# EAGLE board v2 (EAGLE 9.6.2)
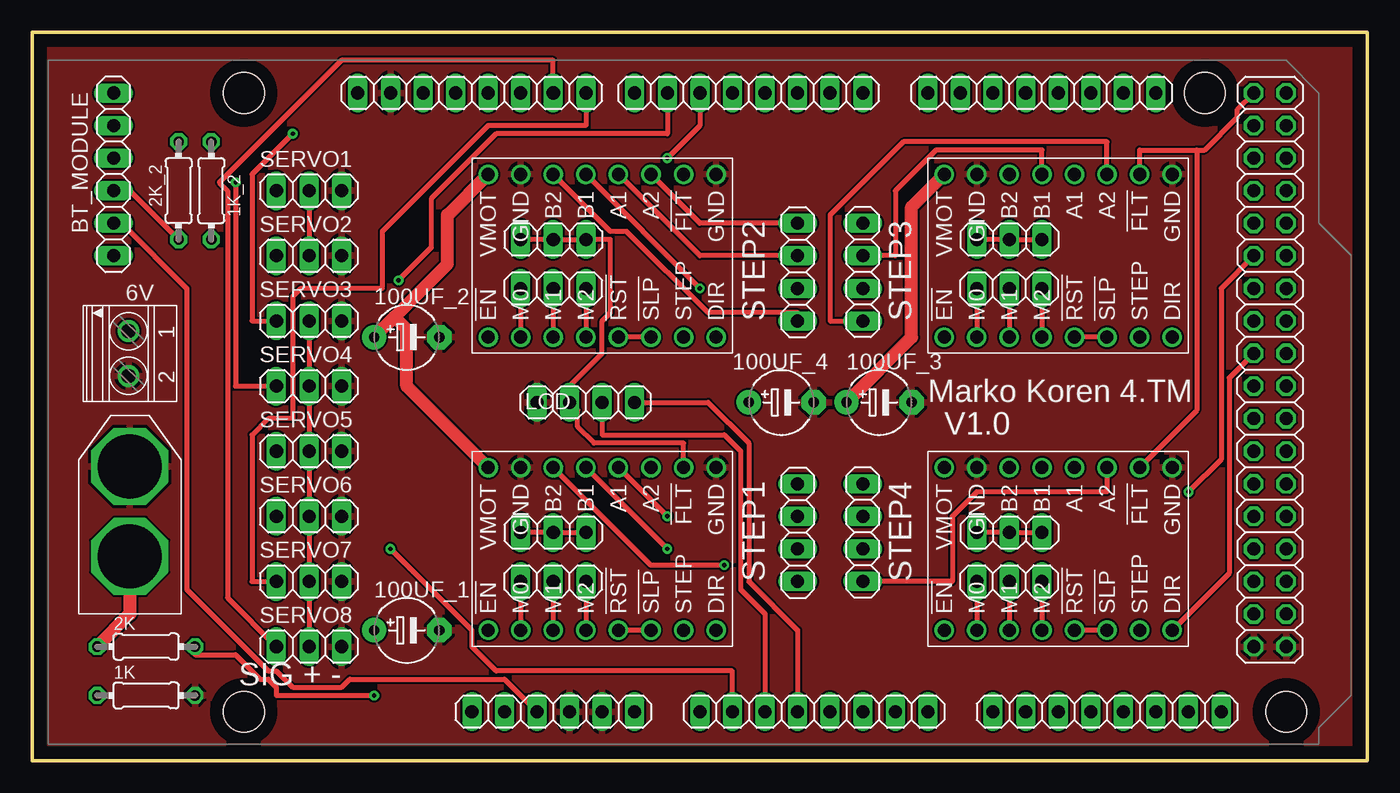
[diagram p0: board, top side]
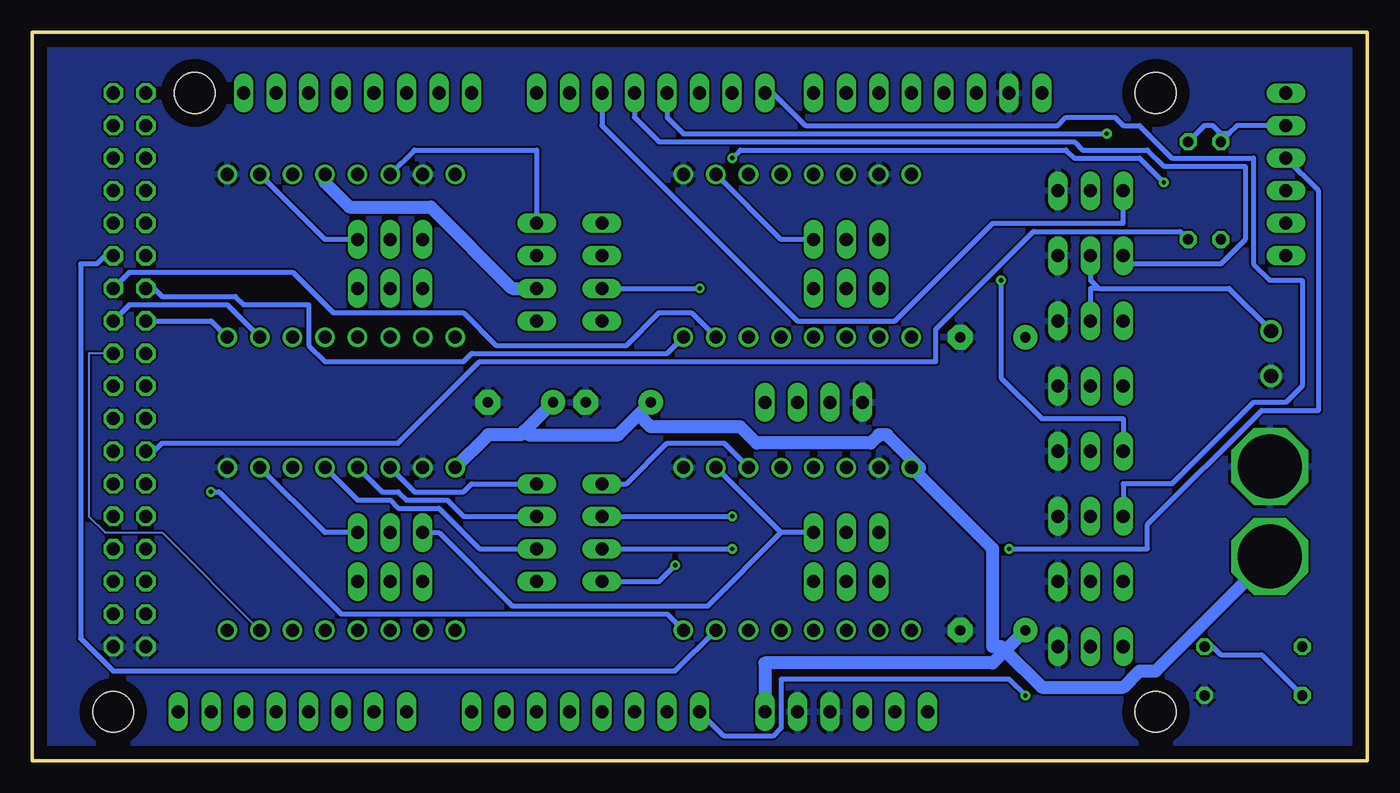
[diagram p1: board, bottom side, seen from below]

Size 104.12 x 56.82 mm. Coordinates in mm from the lower left corner, seen from the top.
Outline: 0,0 104.12,0 104.12,56.82 0,56.82 0,0
Copper layers (1*16): Top 0.035mm / dielectric 1.5mm / Bottom 0.035mm
Design rules "default": minimum track width 6mil, minimum drill 0.35mm, track to track 6mil, track to pad 6mil, pad to pad 6mil, via to via 6mil, smd to smd 6mil, copper to edge 40mil, drill to drill 6mil, minimum pad ring 10mil, minimum via ring 8mil, stop-mask expansion 4mil, vias tented up to drill 0mil, thermal gap 10mil
Net classes: 1 12V: width 1.016 mm, clearance 0.076 mm; 2 ALL: width 0.381 mm, clearance 0.076 mm

## Footprints (pad centres in the part's own frame; a part is rotated, then mirrored left to right if it is on the bottom)
0204/7 = drill 0.813 octagon: 1 -3.81,0; 2 3.81,0
1X03 = drill 1.016 long: 1 -2.54,0; 2 0,0; 3 2.54,0
1751248 = drill 1.1 pad 1.7: 1 -1.75,-0.1; 2 1.75,-0.1
E5-5 = drill 0.813 pad 1.905: + -2.54,0 | drill 0.813 pad 1.905 octagon: - 2.54,0
1X06 = drill 1.016 long: 1 -6.35,0; 2 -3.81,0; 3 -1.27,0; 4 1.27,0; 5 3.81,0; 6 6.35,0
MEGA_ARDUINO_2 = drill 1.016 long: 1 33.02,2.54; 2 35.56,2.54; 3 38.1,2.54; 4 40.64,2.54; 5 43.18,2.54; 6 45.72,2.54; 7 50.8,2.54; 8 53.34,2.54; 9 55.88,2.54; 10 58.42,2.54; 11 60.96,2.54; 12 63.5,2.54; 13 66.04,2.54; 14 68.58,2.54; 15 73.66,2.54; 16 76.2,2.54; 17 78.74,2.54; 18 81.28,2.54; 19 83.82,2.54; 20 86.36,2.54; 21 88.9,2.54; 22 91.44,2.54; 23 86.36,50.8; 24 83.82,50.8; 25 81.28,50.8; 26 78.74,50.8; 27 76.2,50.8; 28 73.66,50.8; 29 71.12,50.8; 30 68.58,50.8; 31 63.5,50.8; 32 60.96,50.8; 33 58.42,50.8; 34 55.88,50.8; 35 53.34,50.8; 36 50.8,50.8; 37 48.26,50.8; 38 45.72,50.8; 39 41.91,50.8; 40 39.37,50.8; 41 36.83,50.8; 42 34.29,50.8; 43 31.75,50.8; 44 29.21,50.8; 45 26.67,50.8; 46 24.13,50.8 | drill 1.016 octagon: 47 93.98,50.8; 48 96.52,50.8; 49 93.98,48.26; 50 96.52,48.26; 51 93.98,45.72; 52 96.52,45.72; 53 93.98,43.18; 54 96.52,43.18; 55 93.98,40.64; 56 96.52,40.64; 57 93.98,38.1; 58 96.52,38.1; 59 93.98,35.56; 60 96.52,35.56; 61 93.98,33.02; 62 96.52,33.02; 63 93.98,30.48; 64 96.52,30.48; 65 93.98,27.94; 66 96.52,27.94; 67 93.98,25.4; 68 96.52,25.4; 69 93.98,22.86; 70 96.52,22.86; 71 93.98,20.32; 72 96.52,20.32; 73 93.98,17.78; 74 96.52,17.78; 75 93.98,15.24; 76 96.52,15.24; 77 93.98,12.7; 78 96.52,12.7; 79 93.98,10.16; 80 96.52,10.16; 81 93.98,7.62; 82 96.52,7.62 | hole 3.2: 15.24,50.8; 15.24,2.54; 90.17,50.8; 96.52,2.54
1X04 = drill 1.016 long: 1 -3.81,0; 2 -1.27,0; 3 1.27,0; 4 3.81,0
DRV8825 = drill 1.016: 1 -6.35,8.89; 2 -6.35,6.35; 3 -6.35,3.81; 4 -6.35,1.27; 5 -6.35,-1.27; 6 -6.35,-3.81; 7 -6.35,-6.35; 8 -6.35,-8.89; 9 6.35,-8.89; 10 6.35,-6.35; 11 6.35,-3.81; 12 6.35,-1.27; 13 6.35,1.27; 14 6.35,3.81; 15 6.35,6.35; 16 6.35,8.89
XT60 = drill 5 octagon: + 4.5,0; - 11.5,0

## Placement (x,y rotation side)
1K  [0204/7]  8.89,5.08 0 top
1K_2  [0204/7]  13.97,44.45 270 top
2K  [0204/7]  8.89,8.89 0 top
2K_2  [0204/7]  11.43,44.45 90 top
5V_1  [1X03]  40.64,17.78 0 top
5V_2  [1X03]  76.2,17.78 0 top
5V_3  [1X03]  76.2,40.64 0 top
5V_4  [1X03]  40.64,40.64 0 top
6V  1751248  [1751248]  7.62,31.75 270 top
100UF_1  [E5-5]  29.21,10.16 0 top
100UF_2  [E5-5]  29.21,33.02 0 top
100UF_3  [E5-5]  66.04,27.94 0 top
100UF_4  [E5-5]  58.42,27.94 0 top
BT_MODULE  [1X06]  6.35,45.72 270 top
IC1  [MEGA_ARDUINO_2]  1.27,1.27 0 top
LCD  [1X04]  43.18,27.94 180 top
MOT2  [1X04]  59.69,38.1 90 top
MOT3  [1X04]  64.77,38.1 270 top
MOT4  [1X04]  64.77,17.78 270 top
MOT_1  [1X04]  59.69,17.78 90 top
SERVO1  [1X03]  21.59,44.45 0 top
SERVO2  [1X03]  21.59,39.37 0 top
SERVO3  [1X03]  21.59,34.29 0 top
SERVO4  [1X03]  21.59,29.21 0 top
SERVO5  [1X03]  21.59,24.13 0 top
SERVO6  [1X03]  21.59,19.05 0 top
SERVO7  [1X03]  21.59,13.97 0 top
SERVO8  [1X03]  21.59,8.89 0 top
STEP1  2133-DRV8825  [DRV8825]  44.45,16.51 90 top
STEP2  2133-DRV8825  [DRV8825]  44.45,39.37 90 top
STEP3  2133-DRV8825  [DRV8825]  80.01,39.37 90 top
STEP4  2133-DRV8825  [DRV8825]  80.01,16.51 90 top
STEPS1  [1X03]  40.64,13.97 180 top
STEPS2  [1X03]  40.64,36.83 180 top
STEPS3  [1X03]  76.2,36.83 180 top
STEPS4  [1X03]  76.2,13.97 180 top
U$1  XT60  [XT60]  7.62,11.43 90 top

## Library data of the parts
1K 1K_2 2K 2K_2 = rcl; SPICEPREFIX: R
5V_1-5V_4 BT_MODULE LCD MOT2-MOT4 MOT_1 SERVO1-SERVO8 STEPS1-STEPS4 = pinhead
6V = con-phoenix-350; OC_FARNELL: unknown; OC_NEWARK: unknown
100UF_1-100UF_4 = rcl; SPICEPREFIX: C
IC1 = arduino
STEP1-STEP4 = pololu-stepper-driver
U$1 = XT60

## Nets
5-6V [ALL]: 6V.1 SERVO1.2 SERVO2.2 SERVO3.2 SERVO4.2 SERVO5.2 SERVO6.2 SERVO7.2 SERVO8.2
12V1 [12V]: 2K.1 100UF_1.+ 100UF_2.+ 100UF_3.+ 100UF_4.+ IC1.6 STEP1.16 STEP2.16 STEP3.16 STEP4.16 U$1.+
30 [ALL]: IC1.57 STEP1.8
31 [ALL]: IC1.58 STEP1.7
32 [ALL]: IC1.59 STEP2.8
33 [ALL]: IC1.60 STEP2.7
34 [ALL]: IC1.61 STEP3.8
35 [ALL]: IC1.62 STEP3.7
36 [ALL]: IC1.63 STEP4.8
37: IC1.64 STEP4.7
+3V3: IC1.2
+5V: IC1.48
A2 [ALL]: IC1.9 LCD.2
A3 [ALL]: IC1.10 LCD.1
GND [ALL]: 1K.2 6V.2 100UF_1.- 100UF_2.- 100UF_3.- 100UF_4.- IC1.4 IC1.5 IC1.45 IC1.81 IC1.82 LCD.4 SERVO1.3 SERVO2.3 SERVO3.3 SERVO4.3 SERVO5.3 SERVO6.3 SERVO7.3 SERVO8.3 STEP1.9 STEP1.15 STEP2.9 STEP2.15 STEP3.9 STEP3.15 STEP4.9 STEP4.15 U$1.-
N$1 [ALL]: 1K.1 2K.2 IC1.7
N$2 [ALL]: MOT_1.1 STEP1.14
N$3 [ALL]: MOT_1.2 STEP1.13
N$4 [ALL]: MOT_1.3 STEP1.12
N$5 [ALL]: MOT_1.4 STEP1.11
N$6 [ALL]: MOT2.1 STEP2.14
N$7 [ALL]: MOT2.2 STEP2.13
N$8 [ALL]: MOT2.3 STEP2.12
N$9 [ALL]: MOT2.4 STEP2.11
N$10 [ALL]: MOT3.1 STEP3.14
N$11 [ALL]: MOT3.2 STEP3.13
N$12 [12V]: MOT3.3 STEP3.12
N$13 [ALL]: MOT3.4 STEP3.11
N$14 [ALL]: MOT4.1 STEP4.14
N$15 [ALL]: MOT4.2 STEP4.13
N$16 [ALL]: MOT4.3 STEP4.12
N$17 [ALL]: MOT4.4 STEP4.11
N$18 [ALL]: STEP1.2 STEPS1.3
N$19 [ALL]: 2K_2.1 BT_MODULE.4
N$20 [ALL]: 1K_2.1 2K_2.2 BT_MODULE.2
N$21 [ALL]: BT_MODULE.5 IC1.3
N$22 [ALL]: STEP1.3 STEPS1.2
N$23 [ALL]: STEP1.4 STEPS1.1
N$24 [ALL]: STEP2.2 STEPS2.3
N$25 [ALL]: STEP2.3 STEPS2.2
N$26 [ALL]: STEP2.4 STEPS2.1
N$27 [ALL]: STEP3.2 STEPS3.3
N$28 [ALL]: STEP3.3 STEPS3.2
N$29 [ALL]: STEP3.4 STEPS3.1
N$30 [ALL]: STEP4.2 STEPS4.3
N$31 [ALL]: STEP4.3 STEPS4.2
N$32 [ALL]: STEP4.4 STEPS4.1
N$33 [ALL]: STEP1.5 STEP1.6
N$34 [ALL]: STEP2.5 STEP2.6
N$35 [ALL]: STEP3.5 STEP3.6
N$36 [ALL]: STEP4.5 STEP4.6
N$37 [ALL]: 5V_1.1 5V_1.2 5V_1.3 5V_2.1 5V_2.2 5V_2.3 5V_3.1 5V_3.2 5V_3.3 5V_4.1 5V_4.2 5V_4.3 IC1.47 LCD.3 STEP1.10 STEP2.10 STEP3.10 STEP4.10
PWM2 [ALL]: IC1.33 SERVO1.1
PWM3 [ALL]: IC1.34 SERVO2.1
PWM4 [ALL]: IC1.35 SERVO3.1
PWM5 [ALL]: IC1.36 SERVO4.1
PWM6 [ALL]: IC1.37 SERVO5.1
PWM7 [ALL]: IC1.38 SERVO6.1
PWM8 [ALL]: IC1.39 SERVO7.1
PWM9 [ALL]: IC1.40 SERVO8.1
RX [ALL]: 1K_2.2 IC1.69
TX [ALL]: BT_MODULE.3 IC1.8

## Tracks (layer width: path | path; a pad name or v marks a point on that pad's centre or on a via)
5-6V
  Top 0.381: SERVO8.2 SERVO7.2 SERVO6.2 SERVO5.2 SERVO4.2 SERVO3.2 | SERVO1.2 SERVO2.2
  Bottom 0.381: 20.95,36.83 10.8,36.83 7.62,33.66 6V.1 | 20.95,36.83 21.59,37.47 SERVO2.2 | SERVO3.2 21.59,36.83 20.95,36.83
12V1
  Top 1.016: STEP3.16 68.58,43.18 68.58,33.02 100UF_3.+ | 2K.1 7.62,11.43 U$1.+ | STEP2.16 32.38,42.55 32.38,38.73 28.26,34.61 | 100UF_2.+ 28.26,34.61 | 28.26,34.61 29.21,33.66 29.21,29.21 STEP1.16
  Bottom 1.016: STEP4.16 68.58,25.4 66.04,25.4 65.72,25.72 | 100UF_3.+ 65.72,25.72 | 56.83,26.99 58.42,25.4 65.41,25.4 65.72,25.72 | 56.83,26.99 100UF_4.+ | IC1.6 46.99,7.62 29.21,7.62 28.26,8.57 | 100UF_1.+ 28.26,8.57 | 28.26,8.57 28.58,8.89 29.21,8.89 29.21,16.51 STEP1.16 34.93,22.86 37.46,25.4 38.1,25.4 38.74,24.77 47.63,24.77 48.9,26.04 55.88,26.04 56.83,26.99 | 28.26,8.57 25.4,5.71 19.05,5.71 17.78,6.98 16.51,6.98 7.62,15.88 U$1.+
30  (via drill 0.35)
  Top 0.381: v90.17,20.95 92.71,23.49 92.71,36.83 IC1.57
  Bottom 0.381: STEP1.8 54.61,11.43 80.01,11.43 89.53,20.95 v90.17,20.95
31
  Bottom 0.381: STEP1.7 53.98,6.98 97.79,6.98 100.33,9.52 100.33,38.73 99.06,38.73 98.43,39.37 IC1.58
32
  Bottom 0.381: STEP2.8 54.61,31.75 69.85,31.75 70.49,31.12 81.28,31.12 82.55,32.38 82.55,35.56 87.63,35.56 88.27,36.2 93.98,36.2 94.62,36.83 IC1.59
33
  Bottom 0.381: STEP2.7 52.71,34.92 55.24,34.92 57.79,32.38 67.94,32.38 70.49,34.92 80.65,34.92 83.82,38.1 96.52,38.1 IC1.60
34
  Bottom 0.381: STEP3.8 90.17,34.29 IC1.61
35
  Bottom 0.381: STEP3.7 88.9,35.56 96.52,35.56 IC1.62
36
  Top 0.381: STEP4.8 93.34,14.61 93.34,29.84 IC1.63
37
  Bottom 0.152: STEP4.7 93.98,17.78 98.43,17.78 99.7,19.05 99.7,31.75 IC1.64
A2
  Top 0.381: IC1.9 57.15,11.43 55.24,13.34 55.24,24.13 53.98,25.4 44.45,25.4 LCD.2
A3
  Top 0.381: IC1.10 59.69,10.16 55.88,13.97 55.88,24.77 52.71,27.94 LCD.1
GND
  pour Top: -1.27,59.69 106.68,59.69 106.68,-2.54 -2.54,-2.54 -2.54,59.69
  pour Bottom: -2.54,59.69 106.68,59.69 106.68,-2.54 -2.54,-2.54
N$1  (via drill 0.35)
  Top 0.381: v26.67,5.08 19.05,5.08 19.05,5.71 18.41,6.35 17.78,6.35 15.88,8.25 12.7,8.25 2K.2
  Bottom 0.381: 1K.1 8.26,8.25 11.43,8.25 12.06,8.89 2K.2 | IC1.7 50.16,1.91 46.35,1.91 45.72,2.54 45.72,6.35 27.94,6.35 v26.67,5.08
N$2  (via drill 0.35)
  Top 0.381: STEP1.14 48.26,15.24 v53.98,15.24
  Bottom 0.381: v53.98,15.24 55.24,13.97 MOT_1.1
N$3  (via drill 0.35)
  Top 0.381: v49.53,16.51 STEP1.13
  Bottom 0.381: MOT_1.2 v49.53,16.51
N$4  (via drill 0.35)
  Top 0.381: v49.53,19.05 STEP1.12
  Bottom 0.381: MOT_1.3 v49.53,19.05
N$5
  Bottom 0.381: STEP1.11 50.16,24.77 54.61,24.77 57.79,21.59 MOT_1.4
N$6
  Top 0.381: STEP2.14 45.09,41.28 46.35,41.28 52.71,34.92 59.69,34.92 MOT2.1
N$7  (via drill 0.35)
  Top 0.381: v52.07,36.83 STEP2.13
  Bottom 0.381: MOT2.2 v52.07,36.83
N$8
  Top 0.381: STEP2.12 52.07,39.37 MOT2.3
N$9
  Top 0.381: STEP2.11 52.07,41.91 MOT2.4
N$10
  Bottom 0.381: MOT3.1 64.77,47.62 74.29,47.62 STEP3.14
N$11
  Top 0.381: MOT3.2 67.31,39.37 67.31,44.45 70.49,47.62 78.74,47.62 STEP3.13
N$12
  Bottom 1.016: MOT3.3 66.68,36.83 73.03,43.18 79.38,43.18 81.28,45.08 STEP3.12
N$13
  Top 0.381: MOT3.4 62.23,34.29 62.23,42.55 67.94,48.26 83.82,48.26 STEP3.11
N$14
  Bottom 0.381: MOT4.1 69.85,21.59 70.49,20.95 74.29,20.95 STEP4.14
N$15
  Bottom 0.381: MOT4.2 70.49,19.05 71.75,20.32 74.93,20.32 75.56,20.95 76.84,20.95 STEP4.13
N$16
  Bottom 0.381: MOT4.3 69.22,16.51 72.39,19.69 75.56,19.69 76.2,20.32 78.74,20.32 STEP4.12
N$17
  Top 0.381: MOT4.4 71.75,13.97 71.75,19.05 73.66,20.95 83.82,20.95 STEP4.11
N$18
  Top 0.381: STEPS1.3 STEP1.2
N$19
  Top 0.381: 2K_2.1 7.62,44.45 BT_MODULE.4
N$20
  Bottom 0.381: 10.8,48.89 10.16,49.53 BT_MODULE.2 | 10.8,48.89 2K_2.2 | 1K_2.1 12.7,49.53 12.06,49.53 11.43,48.89 10.8,48.89
N$21
  Top 0.381: IC1.3 36.83,6.35 24.77,6.35 24.13,5.71 20.32,5.71 19.05,6.98 18.41,6.98 12.06,13.34 12.06,36.83 6.98,41.91 BT_MODULE.5
N$22
  Top 0.381: STEPS1.2 STEP1.3
N$23
  Top 0.381: STEPS1.1 STEP1.4
N$24
  Top 0.381: STEPS2.3 STEP2.2
N$25
  Top 0.381: STEPS2.2 STEP2.3
N$26
  Top 0.381: STEPS2.1 STEP2.4
N$27
  Top 0.381: STEPS3.3 STEP3.2
N$28
  Top 0.381: STEPS3.2 STEP3.3
N$29
  Top 0.381: STEPS3.1 STEP3.4
N$30
  Top 0.381: STEPS4.3 STEP4.2
N$31
  Top 0.381: STEPS4.2 STEP4.3
N$32
  Top 0.381: STEPS4.1 STEP4.4
N$33
  Top 0.381: STEP1.6 STEP1.5
N$34
  Top 0.381: STEP2.6 STEP2.5
N$35
  Top 0.381: STEP3.6 STEP3.5
N$36
  Top 0.381: STEP4.6 STEP4.5
N$37
  Top 0.381: 5V_4.1 5V_4.2 5V_4.3 45.09,40.64 45.09,34.92 44.45,34.29 44.45,31.75 41.91,29.21 LCD.3 42.54,27.3 42.54,26.04 43.82,24.77 50.8,24.77 STEP1.10 | 5V_1.1 5V_1.2 5V_1.3 | 5V_2.1 5V_2.2 5V_2.3 | 5V_3.1 5V_3.2 5V_3.3 | IC1.47 93.98,50.8 93.98,50.17 91.44,47.62 90.81,47.62 | 90.81,47.62 86.36,47.62 STEP3.10 | STEP4.10 90.81,27.3 90.81,47.62
  Bottom 0.381: STEP2.10 45.72,40.64 5V_4.3 | 45.72,17.78 STEP1.10 | 5V_1.3 45.72,17.78 | STEP4.10 81.28,17.78 5V_2.3 | STEP3.10 81.28,40.64 5V_3.3 | 45.72,17.78 51.43,12.06 66.68,12.06 72.39,17.78 5V_2.1
PWM2
  Bottom 0.381: SERVO1.1 19.05,41.91 29.21,41.91 36.83,34.29 44.45,34.29 59.69,49.53 IC1.33
PWM3
  Bottom 0.381: SERVO2.1 18.41,38.73 11.43,38.73 9.52,40.64 9.52,46.36 15.88,46.36 17.15,47.62 22.23,47.62 22.86,48.26 55.24,48.26 57.15,50.17 IC1.34
PWM4  (via drill 0.35)
  Top 0.381: SERVO3.1 17.15,34.29 17.15,45.72 v20.32,48.89
  Bottom 0.381: v20.32,48.89 53.34,48.89 54.61,50.17 IC1.35
PWM5  (via drill 0.35)
  Top 0.381: SERVO4.1 15.88,29.21 v15.88,45.08 | v49.53,46.99 52.07,49.53 IC1.36
  Bottom 0.381: v15.88,45.08 17.78,46.99 22.86,46.99 23.49,47.62 48.9,47.62 v49.53,46.99
PWM6  (via drill 0.35)
  Top 0.381: v28.58,37.47 31.12,40.01 31.12,43.81 36.2,48.89 49.53,48.89 IC1.37
  Bottom 0.381: SERVO5.1 19.05,26.67 25.4,26.67 28.58,29.84 v28.58,37.47
PWM7
  Bottom 0.381: SERVO6.1 19.05,21.59 15.24,21.59 8.89,27.94 6.35,27.94 5.08,29.21 5.08,37.47 7.62,37.47 8.89,38.73 8.89,46.99 15.24,46.99 17.78,49.53 19.05,49.53 19.69,50.17 23.49,50.17 24.13,49.53 43.82,49.53 46.35,52.07 IC1.38
PWM8
  Top 0.381: SERVO7.1 17.15,13.97 17.15,25.4 18.41,26.67 20.32,26.67 20.32,36.2 20.95,36.83 27.3,36.83 27.3,41.28 35.56,49.53 43.18,49.53 IC1.39
PWM9
  Top 0.381: SERVO8.1 15.24,12.7 15.24,44.45 14.61,45.08 24.13,54.61 40.64,54.61 IC1.40
RX
  Bottom 0.381: 1K_2.2 14.61,41.28 26.04,41.28 33.65,33.66 33.65,31.12 69.22,31.12 75.56,24.77 93.98,24.77 94.62,24.13 IC1.69
TX  (via drill 0.35)
  Top 0.381: v27.94,16.51 34.29,10.16 34.29,8.89 36.2,6.98 54.61,6.98 IC1.8
  Bottom 0.381: BT_MODULE.3 3.81,44.45 3.81,27.3 8.26,27.3 17.15,18.41 17.15,16.51 v27.94,16.51

## Text on the board
tPlace: SIG + -
tNames: Marko Koren 4.TM | V1.0